# EAGLE board TinyCube06_Diagonals (EAGLE 7.5.0)
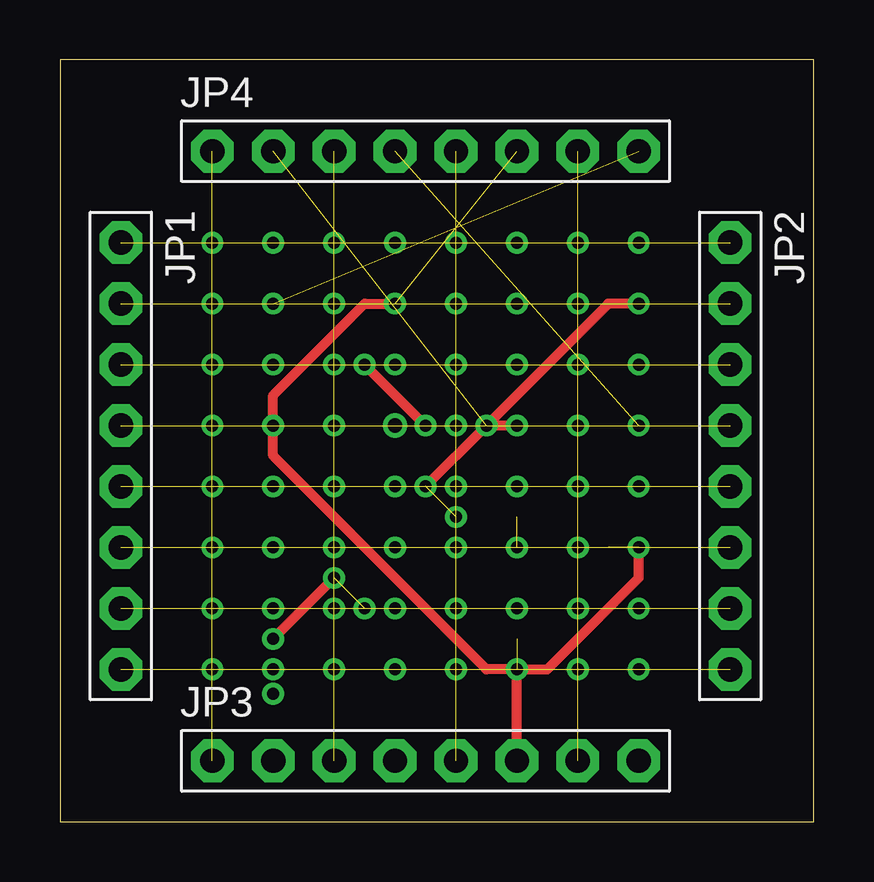
[diagram p0: board, top side]
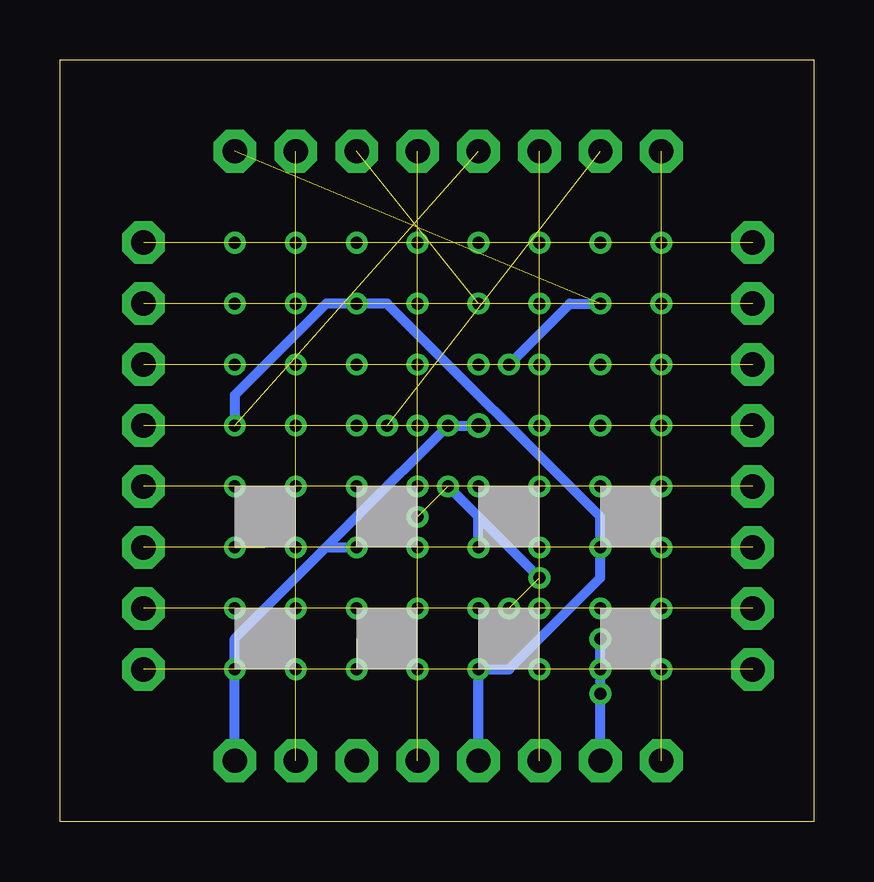
[diagram p1: board, bottom side, seen from below]

Size 31.42 x 31.74 mm. Coordinates in mm from the lower left corner, seen from the top.
Outline: 0,0 31.42,0 31.42,31.74 0,31.74 0,0
Copper layers (1*16): Top 0.035mm / dielectric 1.5mm / Bottom 0.035mm
Design rules "default": minimum track width 10mil, minimum drill 24mil, track to track 8mil, track to pad 8mil, pad to pad 8mil, via to via 8mil, smd to smd 8mil, copper to edge 40mil, drill to drill 8mil, minimum pad ring 10mil, minimum via ring 8mil, stop-mask expansion 4mil, vias tented up to drill 0mil, thermal gap 10mil

## Footprints (pad centres in the part's own frame; a part is rotated, then mirrored left to right if it is on the bottom)
1X08-BIG = drill 1.016 pad 1.778 octagon: 1 -8.89,0; 2 -6.35,0; 3 -3.81,0; 4 -1.27,0; 5 1.27,0; 6 3.81,0; 7 6.35,0; 8 8.89,0

## Placement (x,y rotation side)
JP1  [1X08-BIG]  2.54,15.24 270 top
JP2  [1X08-BIG]  27.94,15.24 270 top
JP3  [1X08-BIG]  15.24,2.54 0 top
JP4  [1X08-BIG]  15.24,27.94 0 top

## Library data of the parts
JP1-JP4 = adafruit

## Nets
N$1: JP1.2 JP2.2
N$4: JP1.5 JP2.5
N$5: JP1.1 JP2.1
N$6: JP1.3 JP2.3
N$7: JP1.4 JP2.4
N$8: JP1.6 JP2.6
N$9: JP1.7 JP2.7
N$10: JP1.8 JP2.8
N$73: JP3.1 JP4.1
N$74: JP3.2 JP4.2
N$75: JP3.3 JP4.3
N$76: JP3.4 JP4.4
N$77: JP3.5 JP4.5
N$78: JP3.6 JP4.6
N$79: JP3.7 JP4.7
N$80: JP3.8 JP4.8

## Tracks (layer width: path | path; a pad name or v marks a point on that pad's centre or on a via)
N$1  (1 unrouted)
N$2  (via drill 0.5 pad 0.25)
  other vias: 8.89,21.59
N$3  (via drill 0.5 pad 0.25)
  other vias: 8.89,19.05
N$4  (1 unrouted)
N$5  (1 unrouted)
N$6  (1 unrouted)
N$7  (1 unrouted)
N$8  (1 unrouted)
N$9  (1 unrouted)
N$10  (1 unrouted)
N$11  (via drill 0.5 pad 0.25)
  other vias: 11.43,24.13
N$12  (via drill 0.5 pad 0.25)
  other vias: 13.97,24.13
N$13  (via drill 0.5 pad 0.25)
  other vias: 6.35,24.13
N$14  (via drill 0.5 pad 0.25)
  other vias: 8.89,24.13
N$15  (via drill 0.5 pad 0.41)
  other vias: 8.89,16.51
N$16  (via drill 0.5 pad 0.25)
  other vias: 11.43,21.59
N$17  (via drill 0.5 pad 0.25)
  other vias: 16.51,24.13
N$18  (via drill 0.5 pad 0.25)
  other vias: 19.05,24.13
N$19  (via drill 0.5 pad 0.25)
  other vias: 11.43,19.05
N$20  (via drill 0.5 pad 0.25)
  other vias: 11.43,16.51
N$21  (via drill 0.5 pad 0.25)
  other vias: 21.59,24.13
N$22  (via drill 0.5 pad 0.25)
  other vias: 24.13,24.13
N$23  (via drill 0.5 pad 0.25)
  other vias: 13.97,21.59
N$24  (via drill 0.5 pad 0.25)
  other vias: 13.97,19.05
N$25  (via drill 0.5 pad 0.25)
  other vias: 6.35,21.59
N$26  (via drill 0.5 pad 0.25)
  other vias: 6.35,19.05
N$27  (via drill 0.5 pad 0.25)
  other vias: 6.35,16.51
N$28  (via drill 0.6 pad 0.25)
  other vias: 13.97,16.51
N$29  (via drill 0.5 pad 0.25)
  other vias: 16.51,21.59
N$30  (via drill 0.5 pad 0.25)
  other vias: 16.51,19.05
N$31  (via drill 0.5 pad 0.25)
  other vias: 16.51,16.51
N$32  (via drill 0.5 pad 0.25)
  other vias: 19.05,21.59
N$33  (via drill 0.5 pad 0.25)
  other vias: 19.05,19.05
N$34  (via drill 0.5 pad 0.25)
  other vias: 19.05,16.51
N$35  (via drill 0.5 pad 0.25)
  other vias: 21.59,21.59
N$36  (via drill 0.5 pad 0.25)
  other vias: 21.59,19.05
N$37  (via drill 0.5 pad 0.25)
  other vias: 21.59,16.51
N$38  (via drill 0.5 pad 0.25)
  other vias: 24.13,21.59
N$39  (via drill 0.5 pad 0.25)
  other vias: 24.13,19.05
N$40  (via drill 0.5 pad 0.25)
  other vias: 24.13,16.51
N$41  (via drill 0.5 pad 0.25)
  other vias: 6.35,13.97
N$42  (via drill 0.5 pad 0.25)
  other vias: 6.35,11.43
N$43  (via drill 0.5 pad 0.25)
  other vias: 6.35,8.89
N$44  (via drill 0.5 pad 0.41)
  other vias: 8.89,13.97
N$45  (via drill 0.5 pad 0.25)
  other vias: 8.89,11.43
N$46  (via drill 0.5 pad 0.25)
  other vias: 8.89,8.89
N$47  (via drill 0.5 pad 0.25)
  other vias: 11.43,13.97
N$48  (via drill 0.5 pad 0.25)
  other vias: 11.43,11.43
N$49  (via drill 0.5 pad 0.25)
  other vias: 11.43,8.89
N$50  (via drill 0.5 pad 0.25)
  other vias: 13.97,13.97
N$51  (via drill 0.5 pad 0.25)
  other vias: 13.97,11.43
N$52  (via drill 0.5 pad 0.25)
  other vias: 13.97,8.89
N$53  (via drill 0.5 pad 0.25)
  other vias: 16.51,13.97
N$54  (via drill 0.5 pad 0.25)
  other vias: 16.51,11.43
N$55  (via drill 0.5 pad 0.25)
  other vias: 16.51,8.89
N$56  (via drill 0.5 pad 0.25)
  other vias: 19.05,13.97
N$57  (via drill 0.5 pad 0.25)
  other vias: 19.05,11.43
N$58  (via drill 0.5 pad 0.25)
  other vias: 19.05,8.89
N$59  (via drill 0.5 pad 0.25)
  other vias: 21.59,13.97
N$60  (via drill 0.5 pad 0.25)
  other vias: 21.59,11.43
N$61  (via drill 0.5 pad 0.25)
  other vias: 21.59,8.89
N$62  (via drill 0.5 pad 0.25)
  other vias: 24.13,13.97
N$63  (via drill 0.5 pad 0.25)
  other vias: 24.13,11.43
N$64  (via drill 0.5 pad 0.25)
  other vias: 24.13,8.89
N$65  (via drill 0.5 pad 0.25)
  other vias: 6.35,6.35
N$66  (via drill 0.5 pad 0.25)
  other vias: 8.89,6.35
N$67  (via drill 0.5 pad 0.25)
  other vias: 11.43,6.35
N$68  (via drill 0.5 pad 0.25)
  other vias: 13.97,6.35
N$69  (via drill 0.5 pad 0.25)
  other vias: 16.51,6.35
N$70  (via drill 0.5 pad 0.25)
  other vias: 19.05,6.35
N$71  (via drill 0.5 pad 0.25)
  other vias: 21.59,6.35
N$72  (via drill 0.5 pad 0.25)
  other vias: 24.13,6.35
N$73  (1 unrouted)
N$74  (via drill 0.5)  (3 unrouted)
  Top 0.406: v8.89,7.62 v11.43,10.16 | 24.13,21.59 22.86,21.59 17.78,16.51 | v15.24,13.97 17.78,16.51 | 19.05,16.51 17.78,16.51
  Bottom 0.406: JP3.2 v8.89,5.33 8.89,5.84 v8.89,7.62 | v15.24,13.97 13.97,12.7 | 13.97,11.43 13.97,12.7 | 13.97,12.7 v11.43,10.16
  other vias: 12.7,8.89 16.51,12.7
N$75  (1 unrouted)
N$76  (1 unrouted)
  Bottom 0.406: JP3.4 13.97,6.35 12.7,6.35 8.89,10.16 8.89,12.7 17.78,21.59 20.32,21.59 24.13,17.78 24.13,16.51
N$77  (1 unrouted)
N$78  (3 unrouted)
  Top 0.406: JP3.6 19.05,6.35 | 13.97,21.59 12.7,21.59 8.89,17.78 8.89,15.24 17.78,6.35 19.05,6.35 | 19.05,6.35 20.32,6.35 24.13,10.16 24.13,11.43
N$79  (1 unrouted)
N$80  (via drill 0.5)  (2 unrouted)
  Top 0.406: v15.24,16.51 v12.7,19.05
  Bottom 0.406: JP3.8 24.13,7.62 20.32,11.43 | 20.32,11.43 19.05,11.43 | 13.97,16.51 v15.24,16.51 19.05,12.7 20.32,11.43 | v12.7,19.05 10.16,21.59 8.89,21.59
N$81  (via drill 0.5)
  other vias: 12.7,19.05
N$82  (via drill 0.5)
  other vias: 8.89,7.62
N$83  (via drill 0.5)
  other vias: 11.43,10.16
N$84  (via drill 0.5)
  other vias: 15.24,13.97
N$85  (via drill 0.5)
  other vias: 17.78,16.51